# Altium PCB Copy of main - shifted.PcbDoc (part 9 of 15)
Units mil, origin at the board's own origin, x right, y up, seen from the top; angles counter-clockwise.
Board outline 8394.55 x 5164.44 mil, 7 copper layers (Top Layer 1, Layer 2, Layer 3, Unused, Layer 4_pow, Layer 5_gnd, Bottom 6+gnd), stack 46.112 mil thick; 363 components, 409 nets, 1750 pads, 991 vias.
Unrouted connection lines stored in the file: 111.
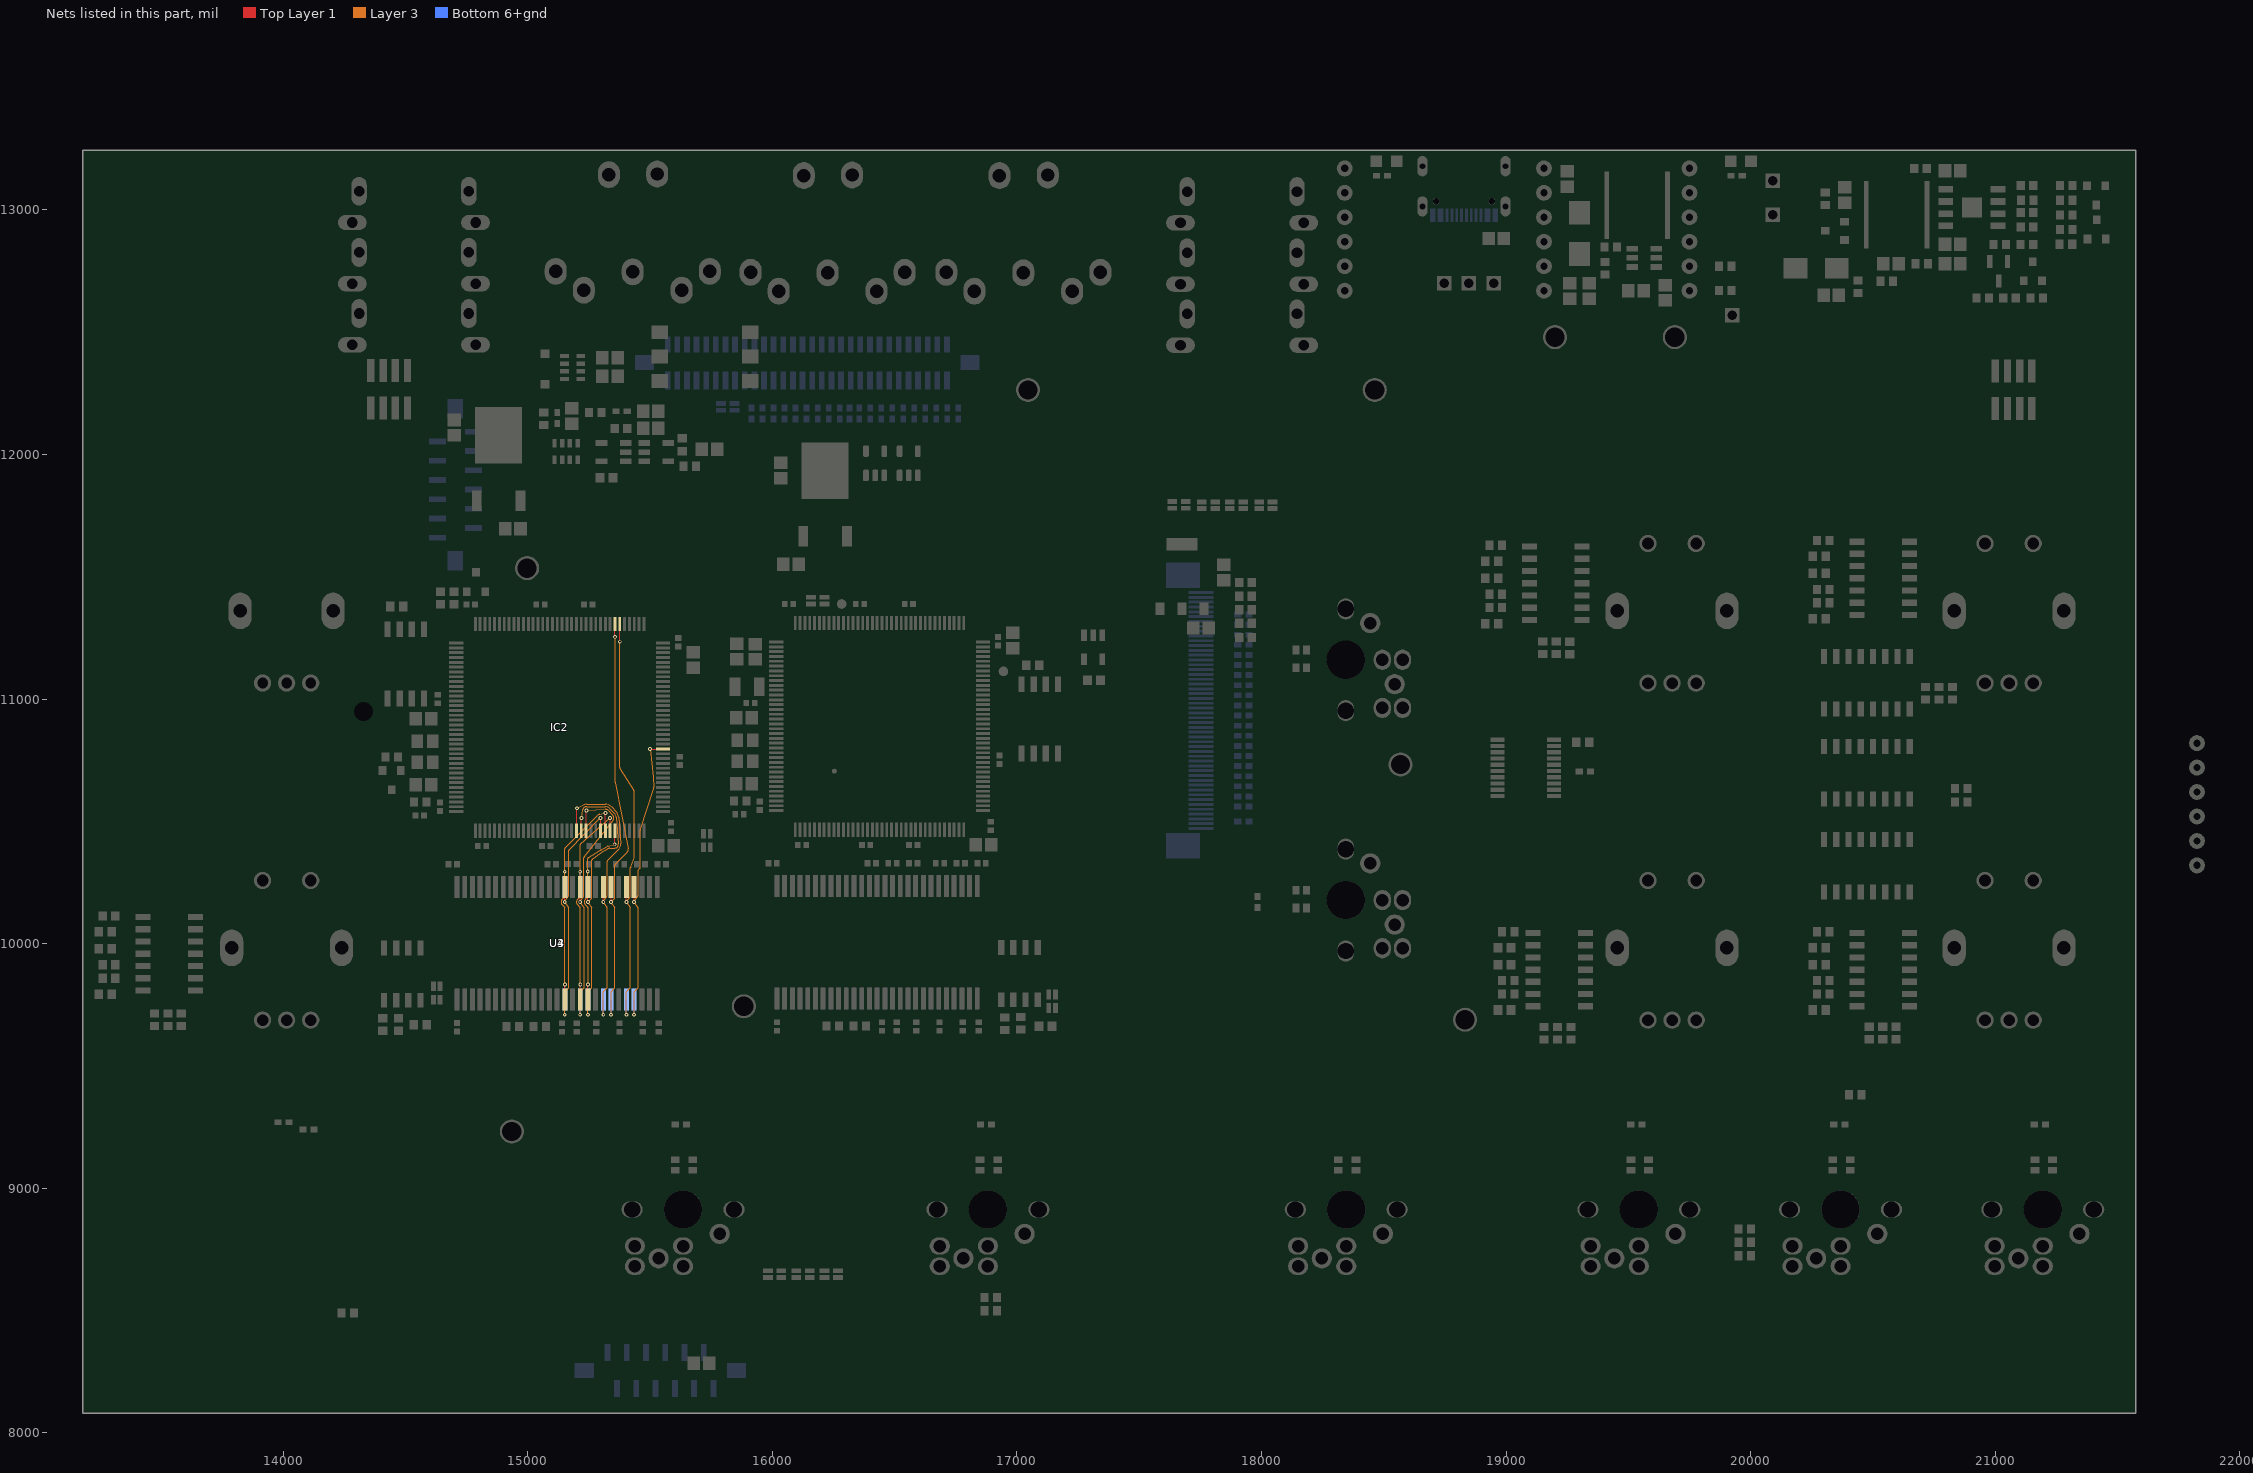
[diagram p12: the nets of this part, all layers, seen from the top]

## Via types
v1: diameter 15.75, hole 7.87, Top Layer 1 to Bottom 6+gnd, tented both sides, 923 vias
v2: diameter 27.56, hole 11.81, Top Layer 1 to Bottom 6+gnd, 45 vias
v3: diameter 23.62/23.62/23.62/23.62/23.62/23.62/23.62 (per signal layer), hole 12, Top Layer 1 to Bottom 6+gnd, tented top, 10 vias
v4: diameter 15.75, hole 7.87, Top Layer 1 to Bottom 6+gnd, 10 vias
v5: diameter 23.62/23.62/23.62/23.62/23.62/23.62/23.62 (per signal layer), hole 12, Top Layer 1 to Bottom 6+gnd, tented bottom, 3 vias

## Nets (pads, with @x,y where several pads share a name; then routed paths per layer and width w, separated by ;. In a path a pad name is that pad's centre, name@x,y a point inside that pad or via, vN(x,y) a via of type N, cw(c..) or ccw(c..) an arc to the next point about the centre after c; other vN are vias at no path point) (continued)
DD1: IC2.86 U3.4 U4.4 | length 1485.1
  Top Layer 1 w5: v1@15434.81,10170.19 U3.4@15434.81,10232.03 ; v1@15500.16,10795.89 IC2.86@15552.45,10795.89
  Layer 3 w5: v1(15434.57,9709.31) 15434.57,9803 15450.69,9819.12 15450.69,10145.78 ; v1(15434.57,10169.94) ccw(c15439.57,10169.94) 15435.62,10166.88 15449.64,10148.8 ; v1@15435.41,10172.73 ccw(c15439.57,10169.94) v1(15434.57,10169.94) ; 15450.69,10197.05 15450.69,10300.48 15458.39,10308.18 ; v1(15499.93,10795.65) 15513.42,10680.61 cw(c15498.15,10678.82) 15513.51,10679.49 15515.29,10638.84 cw(c15499.93,10638.17) 15514.56,10633.47 15460.11,10463.98 ccw(c15464.88,10462.47) 15459.88,10462.5 15459.82,10311.69 ; v1(15434.57,10169.94) cw(c15439.57,10169.94) v1@15435.41,10172.72 ; v1(15434.57,10169.94) cw(c15439.57,10169.94) v1@15435.41,10172.72 ; v1(15434.57,10169.94) cw(c15439.57,10169.94) v1@15435.41,10172.72 ; v1(15434.57,10169.94) cw(c15439.57,10169.94) v1@15435.41,10172.72 ; v1(15434.57,10169.94) cw(c15439.57,10169.94) v1@15435.41,10172.72 ; v1(15434.57,10169.94) cw(c15439.57,10169.94) v1@15435.41,10172.72 ; v1(15434.57,10169.94) cw(c15439.57,10169.94) v1@15435.41,10172.72 ; v1(15434.57,10169.94) cw(c15439.57,10169.94) v1@15435.41,10172.72 ; v1(15434.57,10169.94) cw(c15439.57,10169.94) v1@15435.41,10172.72 ; v1(15434.57,10169.94) cw(c15439.57,10169.94) v1@15435.41,10172.72 ; v1(15434.57,10169.94) cw(c15439.57,10169.94) v1@15435.41,10172.72 ; v1(15434.57,10169.94) cw(c15439.57,10169.94) v1@15435.41,10172.72 ; v1(15434.57,10169.94) cw(c15439.57,10169.94) v1@15435.41,10172.72 ; v1(15434.57,10169.94) cw(c15439.57,10169.94) v1@15435.41,10172.72 ; v1(15434.57,10169.94) cw(c15439.57,10169.94) v1@15435.41,10172.72 ; v1@15435.41,10172.72 15449.85,10194.31 ; 15449.64,10148.8 cw(c15445.69,10145.74) 15450.69,10145.83 ; 15449.64,10148.8 cw(c15445.69,10145.74) 15450.69,10145.83 ; 15449.64,10148.8 cw(c15445.69,10145.74) 15450.69,10145.83 ; 15449.64,10148.8 cw(c15445.69,10145.74) 15450.69,10145.83 ; 15449.64,10148.8 cw(c15445.69,10145.74) 15450.69,10145.83 ; 15449.64,10148.8 cw(c15445.69,10145.74) 15450.69,10145.83 ; 15449.64,10148.8 cw(c15445.69,10145.74) 15450.69,10145.83 ; 15449.64,10148.8 cw(c15445.69,10145.74) 15450.69,10145.83 ; 15449.64,10148.8 cw(c15445.69,10145.74) 15450.69,10145.83 ; 15449.64,10148.8 cw(c15445.69,10145.74) 15450.69,10145.83 ; 15449.64,10148.8 cw(c15445.69,10145.74) 15450.69,10145.83 ; 15449.64,10148.8 cw(c15445.69,10145.74) 15450.69,10145.83 ; 15449.64,10148.8 cw(c15445.69,10145.74) 15450.69,10145.83 ; 15449.64,10148.8 cw(c15445.69,10145.74) 15450.69,10145.83 ; 15449.64,10148.8 cw(c15445.69,10145.74) 15450.69,10145.83 ; 15449.64,10148.8 cw(c15445.69,10145.74) 15450.69,10145.83 ; 15449.85,10194.32 ccw(c15445.69,10197.09) 15450.69,10197 ; 15449.85,10194.32 ccw(c15445.69,10197.09) 15450.69,10197 ; 15449.85,10194.32 ccw(c15445.69,10197.09) 15450.69,10197 ; 15449.85,10194.32 ccw(c15445.69,10197.09) 15450.69,10197 ; 15449.85,10194.32 ccw(c15445.69,10197.09) 15450.69,10197 ; 15449.85,10194.32 ccw(c15445.69,10197.09) 15450.69,10197 ; 15449.85,10194.32 ccw(c15445.69,10197.09) 15450.69,10197 ; 15449.85,10194.32 ccw(c15445.69,10197.09) 15450.69,10197 ; 15449.85,10194.32 ccw(c15445.69,10197.09) 15450.69,10197 ; 15449.85,10194.32 ccw(c15445.69,10197.09) 15450.69,10197 ; 15449.85,10194.32 ccw(c15445.69,10197.09) 15450.69,10197 ; 15449.85,10194.32 ccw(c15445.69,10197.09) 15450.69,10197 ; 15449.85,10194.32 ccw(c15445.69,10197.09) 15450.69,10197 ; 15449.85,10194.32 ccw(c15445.69,10197.09) 15450.69,10197 ; 15449.85,10194.32 ccw(c15445.69,10197.09) 15450.69,10197 ; 15449.84,10194.31 ccw(c15445.69,10197.09) 15450.69,10197 ; 15458.41,10308.2 ccw(c15454.82,10311.69) 15459.82,10311.69 ; 15458.41,10308.2 ccw(c15454.82,10311.69) 15459.82,10311.69 ; 15458.41,10308.2 ccw(c15454.82,10311.69) 15459.82,10311.69 ; 15458.41,10308.2 ccw(c15454.82,10311.69) 15459.82,10311.69 ; 15458.41,10308.2 ccw(c15454.82,10311.69) 15459.82,10311.69 ; 15458.41,10308.2 ccw(c15454.82,10311.69) 15459.82,10311.69 ; 15458.41,10308.2 ccw(c15454.82,10311.69) 15459.82,10311.69 ; 15458.41,10308.2 ccw(c15454.82,10311.69) 15459.82,10311.69 ; 15458.41,10308.2 ccw(c15454.82,10311.69) 15459.82,10311.69 ; 15458.41,10308.2 ccw(c15454.82,10311.69) 15459.82,10311.69 ; 15458.41,10308.2 ccw(c15454.82,10311.69) 15459.82,10311.69 ; 15458.41,10308.2 ccw(c15454.82,10311.69) 15459.82,10311.69 ; 15458.41,10308.2 ccw(c15454.82,10311.69) 15459.82,10311.69 ; 15458.41,10308.2 ccw(c15454.82,10311.69) 15459.82,10311.69 ; 15458.41,10308.2 ccw(c15454.82,10311.69) 15459.82,10311.69 ; 15458.41,10308.2 ccw(c15454.82,10311.69) 15459.82,10311.69
  Bottom 6+gnd w5: v1@15434.81,9709.56 U4.4@15434.81,9771.4
DD2: IC2.114 U3.5 U4.5 | length 2000.5
  Top Layer 1 w5: v1@15375.91,11234.79 IC2.114@15375.91,11307.38 ; v1@15403.31,10170.19 U3.5@15403.31,10232.03
  Layer 3 w5: v1(15375.99,11234.71) 15375.99,10720.56 ccw(c15380.99,10720.56) 15376.75,10717.91 15432.87,10627.81 15432.91,10627.75 cw(c15419.85,10619.63) 15435.22,10619.63 15435.22,10354.63 ; v1(15403.07,9709.31) 15403.07,9803 15419.19,9819.12 15419.19,10145.78 ; v1(15403.07,10169.94) ccw(c15408.07,10169.94) 15404.12,10166.88 15418.14,10148.8 ; v1(15403.07,10169.94) cw(c15408.07,10169.94) 15404.16,10173.06 15418.6,10191.26 ; 15418.14,10148.8 cw(c15414.19,10145.74) 15419.19,10145.83 ; 15418.14,10148.8 cw(c15414.19,10145.74) 15419.19,10145.83 ; 15418.14,10148.8 cw(c15414.19,10145.74) 15419.19,10145.83 ; 15418.14,10148.8 cw(c15414.19,10145.74) 15419.19,10145.83 ; 15418.14,10148.8 cw(c15414.19,10145.74) 15419.19,10145.83 ; 15418.14,10148.8 cw(c15414.19,10145.74) 15419.19,10145.83 ; 15418.14,10148.8 cw(c15414.19,10145.74) 15419.19,10145.83 ; 15418.14,10148.8 cw(c15414.19,10145.74) 15419.19,10145.83 ; 15418.14,10148.8 cw(c15414.19,10145.74) 15419.19,10145.83 ; 15418.14,10148.8 cw(c15414.19,10145.74) 15419.19,10145.83 ; 15418.14,10148.8 cw(c15414.19,10145.74) 15419.19,10145.83 ; 15418.14,10148.8 cw(c15414.19,10145.74) 15419.19,10145.83 ; 15418.14,10148.8 cw(c15414.19,10145.74) 15419.19,10145.83 ; 15418.14,10148.8 cw(c15414.19,10145.74) 15419.19,10145.83 ; 15418.14,10148.8 cw(c15414.19,10145.74) 15419.19,10145.83 ; 15418.14,10148.8 cw(c15414.19,10145.74) 15419.19,10145.83 ; 15418.6,10191.26 ccw(c15414.68,10194.37) 15419.68,10194.28 ; 15418.6,10191.26 ccw(c15414.68,10194.37) 15419.68,10194.28 ; 15418.6,10191.26 ccw(c15414.68,10194.37) 15419.68,10194.28 ; 15418.6,10191.26 ccw(c15414.68,10194.37) 15419.68,10194.28 ; 15418.6,10191.26 ccw(c15414.68,10194.37) 15419.68,10194.28 ; 15418.6,10191.26 ccw(c15414.68,10194.37) 15419.68,10194.28 ; 15418.6,10191.26 ccw(c15414.68,10194.37) 15419.68,10194.28 ; 15418.6,10191.26 ccw(c15414.68,10194.37) 15419.68,10194.28 ; 15418.6,10191.26 ccw(c15414.68,10194.37) 15419.68,10194.28 ; 15418.6,10191.26 ccw(c15414.68,10194.37) 15419.68,10194.28 ; 15418.6,10191.26 ccw(c15414.68,10194.37) 15419.68,10194.28 ; 15418.6,10191.26 ccw(c15414.68,10194.37) 15419.68,10194.28 ; 15418.6,10191.26 ccw(c15414.68,10194.37) 15419.68,10194.28 ; 15418.6,10191.26 ccw(c15414.68,10194.37) 15419.68,10194.28 ; 15418.6,10191.26 ccw(c15414.68,10194.37) 15419.68,10194.28 ; 15418.6,10191.26 ccw(c15414.68,10194.37) 15419.68,10194.28 ; 15419.68,10194.32 15419.68,10309.9 cw(c15424.68,10309.91) 15420.04,10311.76 15433.41,10345.21 ; 15433.41,10345.21 ccw(c15409.85,10354.63) 15435.22,10354.63 ; 15433.41,10345.21 ccw(c15409.85,10354.63) 15435.22,10354.63 ; 15433.41,10345.21 ccw(c15409.85,10354.63) 15435.22,10354.63 ; 15433.41,10345.21 ccw(c15409.85,10354.63) 15435.22,10354.63 ; 15433.41,10345.21 ccw(c15409.85,10354.63) 15435.22,10354.63 ; 15433.41,10345.21 ccw(c15409.85,10354.63) 15435.22,10354.63 ; 15433.41,10345.21 ccw(c15409.85,10354.63) 15435.22,10354.63 ; 15433.41,10345.21 ccw(c15409.85,10354.63) 15435.22,10354.63 ; 15433.41,10345.21 ccw(c15409.85,10354.63) 15435.22,10354.63 ; 15433.41,10345.21 ccw(c15409.85,10354.63) 15435.22,10354.63 ; 15433.41,10345.21 ccw(c15409.85,10354.63) 15435.22,10354.63 ; 15433.41,10345.21 ccw(c15409.85,10354.63) 15435.22,10354.63 ; 15433.41,10345.21 ccw(c15409.85,10354.63) 15435.22,10354.63 ; 15433.41,10345.21 ccw(c15409.85,10354.63) 15435.22,10354.63 ; 15433.41,10345.21 ccw(c15409.85,10354.63) 15435.22,10354.63 ; 15433.41,10345.21 ccw(c15409.85,10354.63) 15435.22,10354.63
  Bottom 6+gnd w5: v1@15403.31,9709.56 U4.5@15403.31,9771.4
DD3: IC2.115 U3.7 U4.7 | length 1873.2
  Top Layer 1 w5: v1@15340.32,10170.19 U3.7@15340.32,10232.03 ; v1@15356.39,11254.94 IC2.115@15356.39,11307.23
  Layer 3 w5: v1(15340.08,9709.31) 15340.08,9803 15356.2,9819.12 15356.2,10145.78 ; 15355.7,10187.59 cw(c15350.7,10187.68) 15354.24,10184.15 v1(15340.08,10169.94) v1@15340.08,10167.87 ; 15355.7,10187.64 15355.7,10320.48 cw(c15360.7,10320.49) 15357.12,10323.97 15405.85,10373.89 ccw(c15394.85,10384.63) 15409.93,10387.61 15356.72,10658.97 cw(c15361.62,10659.93) 15356.62,10659.93 v1(15356.62,11254.71) ; v1@15340.08,10167.87 ccw(c15345.08,10167.88) v1@15341.32,10164.58 ; v1@15340.08,10167.87 ccw(c15345.08,10167.88) v1@15341.32,10164.58 ; v1@15340.08,10167.87 ccw(c15345.08,10167.88) v1@15341.32,10164.58 ; v1@15340.08,10167.87 ccw(c15345.08,10167.88) v1@15341.32,10164.58 ; v1@15340.08,10167.87 ccw(c15345.08,10167.88) v1@15341.32,10164.58 ; v1@15340.08,10167.87 ccw(c15345.08,10167.88) v1@15341.32,10164.58 ; v1@15340.08,10167.87 ccw(c15345.08,10167.88) v1@15341.32,10164.58 ; v1@15340.08,10167.87 ccw(c15345.08,10167.88) v1@15341.32,10164.58 ; v1@15340.08,10167.87 ccw(c15345.08,10167.88) v1@15341.32,10164.58 ; v1@15340.08,10167.87 ccw(c15345.08,10167.88) v1@15341.32,10164.58 ; v1@15340.08,10167.87 ccw(c15345.08,10167.88) v1@15341.32,10164.58 ; v1@15340.08,10167.87 ccw(c15345.08,10167.88) v1@15341.32,10164.58 ; v1@15340.08,10167.87 ccw(c15345.08,10167.88) v1@15341.32,10164.58 ; v1@15340.08,10167.87 ccw(c15345.08,10167.88) v1@15341.32,10164.58 ; v1@15340.08,10167.87 ccw(c15345.08,10167.88) v1@15341.32,10164.58 ; v1@15340.08,10167.87 ccw(c15345.08,10167.88) v1@15341.32,10164.58 ; v1@15341.32,10164.58 15354.96,10149.04 ; 15354.96,10149.04 cw(c15351.2,10145.74) 15356.2,10145.83 ; 15354.96,10149.04 cw(c15351.2,10145.74) 15356.2,10145.83 ; 15354.96,10149.04 cw(c15351.2,10145.74) 15356.2,10145.83 ; 15354.96,10149.04 cw(c15351.2,10145.74) 15356.2,10145.83 ; 15354.96,10149.04 cw(c15351.2,10145.74) 15356.2,10145.83 ; 15354.96,10149.04 cw(c15351.2,10145.74) 15356.2,10145.83 ; 15354.96,10149.04 cw(c15351.2,10145.74) 15356.2,10145.83 ; 15354.96,10149.04 cw(c15351.2,10145.74) 15356.2,10145.83 ; 15354.96,10149.04 cw(c15351.2,10145.74) 15356.2,10145.83 ; 15354.96,10149.04 cw(c15351.2,10145.74) 15356.2,10145.83 ; 15354.96,10149.04 cw(c15351.2,10145.74) 15356.2,10145.83 ; 15354.96,10149.04 cw(c15351.2,10145.74) 15356.2,10145.83 ; 15354.96,10149.04 cw(c15351.2,10145.74) 15356.2,10145.83 ; 15354.96,10149.04 cw(c15351.2,10145.74) 15356.2,10145.83 ; 15354.96,10149.04 cw(c15351.2,10145.74) 15356.2,10145.83 ; 15354.96,10149.04 cw(c15351.2,10145.74) 15356.2,10145.83
  Bottom 6+gnd w5: v1@15340.32,9709.56 U4.7@15340.32,9771.4
DD4: IC2.58 U3.8 U4.8 | length 2377.5
  Top Layer 1 w5: IC2.58@15198.91,10461.71 15199.3,10462.11 15199.3,10552.4 v1(15200.72,10553.82) ; v1@15308.83,10170.19 U3.8@15308.83,10232.03
  Layer 3 w5: v1(15200.72,10553.82) 15228.76,10567.45 ; v1(15308.58,9709.31) 15308.58,9803 15324.7,9819.12 15324.7,10145.78 ; 15324.95,10198.16 15324.95,10337.31 ; 15228.76,10567.45 cw(c15239.85,10544.63) 15239.93,10570 ; 15228.76,10567.45 cw(c15239.85,10544.63) 15239.93,10570 ; 15228.76,10567.45 cw(c15239.85,10544.63) 15239.93,10570 ; 15228.76,10567.45 cw(c15239.85,10544.63) 15239.93,10570 ; 15228.76,10567.45 cw(c15239.85,10544.63) 15239.93,10570 ; 15228.76,10567.45 cw(c15239.85,10544.63) 15239.93,10570 ; 15228.76,10567.45 cw(c15239.85,10544.63) 15239.93,10570 ; 15228.76,10567.45 cw(c15239.85,10544.63) 15239.93,10570 ; 15228.76,10567.45 cw(c15239.85,10544.63) 15239.93,10570 ; 15228.76,10567.45 cw(c15239.85,10544.63) 15239.93,10570 ; 15228.76,10567.45 cw(c15239.85,10544.63) 15239.93,10570 ; 15228.76,10567.45 cw(c15239.85,10544.63) 15239.93,10570 ; 15228.76,10567.45 cw(c15239.85,10544.63) 15239.93,10570 ; 15228.76,10567.45 cw(c15239.85,10544.63) 15239.93,10570 ; 15228.76,10567.45 cw(c15239.85,10544.63) 15239.93,10570 ; 15228.76,10567.45 cw(c15239.85,10544.63) 15239.93,10570 ; 15239.93,10570 15317.02,10569.77 ; 15317.02,10569.77 cw(c15316.94,10534.39) 15342.36,10558.99 ; 15317.02,10569.77 cw(c15316.94,10534.39) 15342.36,10558.99 ; 15317.02,10569.77 cw(c15316.94,10534.39) 15342.36,10558.99 ; 15317.02,10569.77 cw(c15316.94,10534.39) 15342.36,10558.99 ; 15317.02,10569.77 cw(c15316.94,10534.39) 15342.36,10558.99 ; 15317.02,10569.77 cw(c15316.94,10534.39) 15342.36,10558.99 ; 15317.02,10569.77 cw(c15316.94,10534.39) 15342.36,10558.99 ; 15317.02,10569.77 cw(c15316.94,10534.39) 15342.36,10558.99 ; 15317.02,10569.77 cw(c15316.94,10534.39) 15342.36,10558.99 ; 15317.02,10569.77 cw(c15316.94,10534.39) 15342.36,10558.99 ; 15317.02,10569.77 cw(c15316.94,10534.39) 15342.36,10558.99 ; 15317.02,10569.77 cw(c15316.94,10534.39) 15342.36,10558.99 ; 15317.02,10569.77 cw(c15316.94,10534.39) 15342.36,10558.99 ; 15317.02,10569.77 cw(c15316.94,10534.39) 15342.36,10558.99 ; 15317.02,10569.77 cw(c15316.94,10534.39) 15342.36,10558.99 ; 15317.02,10569.77 cw(c15316.94,10534.39) 15342.36,10558.99 ; 15323.65,10148.8 cw(c15319.7,10145.74) 15324.7,10145.83 ; 15323.65,10148.8 cw(c15319.7,10145.74) 15324.7,10145.83 ; 15323.65,10148.8 cw(c15319.7,10145.74) 15324.7,10145.83 ; 15323.65,10148.8 cw(c15319.7,10145.74) 15324.7,10145.83 ; 15323.65,10148.8 cw(c15319.7,10145.74) 15324.7,10145.83 ; 15323.65,10148.8 cw(c15319.7,10145.74) 15324.7,10145.83 ; 15323.65,10148.8 cw(c15319.7,10145.74) 15324.7,10145.83 ; 15323.65,10148.8 cw(c15319.7,10145.74) 15324.7,10145.83 ; 15323.65,10148.8 cw(c15319.7,10145.74) 15324.7,10145.83 ; 15323.65,10148.8 cw(c15319.7,10145.74) 15324.7,10145.83 ; 15323.65,10148.8 cw(c15319.7,10145.74) 15324.7,10145.83 ; 15323.65,10148.8 cw(c15319.7,10145.74) 15324.7,10145.83 ; 15323.65,10148.8 cw(c15319.7,10145.74) 15324.7,10145.83 ; 15323.65,10148.8 cw(c15319.7,10145.74) 15324.7,10145.83 ; 15323.65,10148.8 cw(c15319.7,10145.74) 15324.7,10145.83 ; 15323.65,10148.8 cw(c15319.7,10145.74) 15324.7,10145.83 ; 15323.65,10148.8 15309.64,10166.87 cw(c15313.58,10169.94) v1(15308.58,10169.94) 15308.58,10170 cw(c15313.58,10169.94) 15309.38,10172.66 15324.15,10195.49 ; 15324.15,10195.49 ccw(c15319.95,10198.21) 15324.95,10198.12 ; 15324.15,10195.49 ccw(c15319.95,10198.21) 15324.95,10198.12 ; 15324.15,10195.49 ccw(c15319.95,10198.21) 15324.95,10198.12 ; 15324.15,10195.49 ccw(c15319.95,10198.21) 15324.95,10198.12 ; 15324.15,10195.49 ccw(c15319.95,10198.21) 15324.95,10198.12 ; 15324.15,10195.49 ccw(c15319.95,10198.21) 15324.95,10198.12 ; 15324.15,10195.49 ccw(c15319.95,10198.21) 15324.95,10198.12 ; 15324.15,10195.49 ccw(c15319.95,10198.21) 15324.95,10198.12 ; 15324.15,10195.49 ccw(c15319.95,10198.21) 15324.95,10198.12 ; 15324.15,10195.49 ccw(c15319.95,10198.21) 15324.95,10198.12 ; 15324.15,10195.49 ccw(c15319.95,10198.21) 15324.95,10198.12 ; 15324.15,10195.49 ccw(c15319.95,10198.21) 15324.95,10198.12 ; 15324.15,10195.49 ccw(c15319.95,10198.21) 15324.95,10198.12 ; 15324.15,10195.49 ccw(c15319.95,10198.21) 15324.95,10198.12 ; 15324.15,10195.49 ccw(c15319.95,10198.21) 15324.95,10198.12 ; 15324.15,10195.49 ccw(c15319.95,10198.21) 15324.95,10198.12 ; 15324.95,10337.31 cw(c15329.95,10337.31) 15326.4,10340.82 ; 15324.95,10337.31 cw(c15329.95,10337.31) 15326.4,10340.82 ; 15324.95,10337.31 cw(c15329.95,10337.31) 15326.4,10340.82 ; 15324.95,10337.31 cw(c15329.95,10337.31) 15326.4,10340.82 ; 15324.95,10337.31 cw(c15329.95,10337.31) 15326.4,10340.82 ; 15324.95,10337.31 cw(c15329.95,10337.31) 15326.4,10340.82 ; 15324.95,10337.31 cw(c15329.95,10337.31) 15326.4,10340.82 ; 15324.95,10337.31 cw(c15329.95,10337.31) 15326.4,10340.82 ; 15324.95,10337.31 cw(c15329.95,10337.31) 15326.4,10340.82 ; 15324.95,10337.31 cw(c15329.95,10337.31) 15326.4,10340.82 ; 15324.95,10337.31 cw(c15329.95,10337.31) 15326.4,10340.82 ; 15324.95,10337.31 cw(c15329.95,10337.31) 15326.4,10340.82 ; 15324.95,10337.31 cw(c15329.95,10337.31) 15326.4,10340.82 ; 15324.95,10337.31 cw(c15329.95,10337.31) 15326.4,10340.82 ; 15324.95,10337.31 cw(c15329.95,10337.31) 15326.4,10340.82 ; 15324.95,10337.31 cw(c15329.95,10337.31) 15326.4,10340.82 ; 15326.4,10340.82 15327.98,10342.4 ; 15327.98,10342.4 ccw(c15310,10360.32) 15328.11,10342.53 ; 15327.98,10342.4 ccw(c15310,10360.32) 15328.11,10342.53 ; 15327.98,10342.4 ccw(c15310,10360.32) 15328.11,10342.53 ; 15327.98,10342.4 ccw(c15310,10360.32) 15328.11,10342.53 ; 15327.98,10342.4 ccw(c15310,10360.32) 15328.11,10342.53 ; 15327.98,10342.4 ccw(c15310,10360.32) 15328.11,10342.53 ; 15327.98,10342.4 ccw(c15310,10360.32) 15328.11,10342.53 ; 15327.98,10342.4 ccw(c15310,10360.32) 15328.11,10342.53 ; 15327.98,10342.4 ccw(c15310,10360.32) 15328.11,10342.53 ; 15327.98,10342.4 ccw(c15310,10360.32) 15328.11,10342.53 ; 15327.98,10342.4 ccw(c15310,10360.32) 15328.11,10342.53 ; 15327.98,10342.4 ccw(c15310,10360.32) 15328.11,10342.53 ; 15327.98,10342.4 ccw(c15310,10360.32) 15328.11,10342.53 ; 15327.98,10342.4 ccw(c15310,10360.32) 15328.11,10342.53 ; 15327.98,10342.4 ccw(c15310,10360.32) 15328.11,10342.53 ; 15327.98,10342.4 ccw(c15310,10360.32) 15328.11,10342.53 ; 15328.11,10342.53 15373.31,10388.55 ccw(c15355.21,10406.33) 15380.5,10408.4 15371.56,10517.28 ; 15342.36,10558.99 15361.68,10539.04 ; 15361.68,10539.04 cw(c15336.31,10514.39) 15371.56,10517.29 ; 15361.68,10539.04 cw(c15336.31,10514.39) 15371.56,10517.29 ; 15361.68,10539.04 cw(c15336.31,10514.39) 15371.56,10517.29 ; 15361.68,10539.04 cw(c15336.31,10514.39) 15371.56,10517.29 ; 15361.68,10539.04 cw(c15336.31,10514.39) 15371.56,10517.29 ; 15361.68,10539.04 cw(c15336.31,10514.39) 15371.56,10517.29 ; 15361.68,10539.04 cw(c15336.31,10514.39) 15371.56,10517.29 ; 15361.68,10539.04 cw(c15336.31,10514.39) 15371.56,10517.29 ; 15361.68,10539.04 cw(c15336.31,10514.39) 15371.56,10517.29 ; 15361.68,10539.04 cw(c15336.31,10514.39) 15371.56,10517.29 ; 15361.68,10539.04 cw(c15336.31,10514.39) 15371.56,10517.29 ; 15361.68,10539.04 cw(c15336.31,10514.39) 15371.56,10517.29 ; 15361.68,10539.04 cw(c15336.31,10514.39) 15371.56,10517.29 ; 15361.68,10539.04 cw(c15336.31,10514.39) 15371.56,10517.29 ; 15361.68,10539.04 cw(c15336.31,10514.39) 15371.56,10517.29 ; 15361.68,10539.04 cw(c15336.31,10514.39) 15371.56,10517.29
  Bottom 6+gnd w5: v1@15308.83,9709.56 U4.8@15308.83,9771.4
DD5: IC2.59 U3.10 U4.10 | length 2188.2
  Top Layer 1 w5: IC2.59@15218.43,10461.87 15219,10462.44 15219,10513.82 v1(15219.57,10514.39) ; v1@15245.83,10170.19 U3.10@15245.83,10232.03
  Layer 3 w5: v1(15219.57,10514.39) 15224.66,10547 cw(c15239.85,10544.63) 15239.9,10560 15317.01,10559.77 ; v1(15245.59,9709.31) 15245.59,9803 15261.71,9819.12 15261.71,10145.78 ; 15327.17,10387.95 cw(c15334.85,10374.63) 15334.15,10389.99 ; v1@15245.59,10167.87 ccw(c15250.59,10167.88) v1@15246.83,10164.58 ; v1@15245.59,10167.87 ccw(c15250.59,10167.88) v1@15246.83,10164.58 ; v1@15245.59,10167.87 ccw(c15250.59,10167.88) v1@15246.83,10164.58 ; v1@15245.59,10167.87 ccw(c15250.59,10167.88) v1@15246.83,10164.58 ; v1@15245.59,10167.87 ccw(c15250.59,10167.88) v1@15246.83,10164.58 ; v1@15245.59,10167.87 ccw(c15250.59,10167.88) v1@15246.83,10164.58 ; v1@15245.59,10167.87 ccw(c15250.59,10167.88) v1@15246.83,10164.58 ; v1@15245.59,10167.87 ccw(c15250.59,10167.88) v1@15246.83,10164.58 ; v1@15245.59,10167.87 ccw(c15250.59,10167.88) v1@15246.83,10164.58 ; v1@15245.59,10167.87 ccw(c15250.59,10167.88) v1@15246.83,10164.58 ; v1@15245.59,10167.87 ccw(c15250.59,10167.88) v1@15246.83,10164.58 ; v1@15245.59,10167.87 ccw(c15250.59,10167.88) v1@15246.83,10164.58 ; v1@15245.59,10167.87 ccw(c15250.59,10167.88) v1@15246.83,10164.58 ; v1@15245.59,10167.87 ccw(c15250.59,10167.88) v1@15246.83,10164.58 ; v1@15245.59,10167.87 ccw(c15250.59,10167.88) v1@15246.83,10164.58 ; v1@15245.59,10167.87 ccw(c15250.59,10167.88) v1@15246.83,10164.58 ; v1@15245.59,10167.87 v1(15245.59,10169.94) 15259.84,10184.24 ccw(c15256.3,10187.77) 15261.3,10187.68 15261.3,10340.53 cw(c15266.3,10340.53) 15263.3,10344.53 15300.79,10372.62 ; v1@15246.83,10164.58 15260.47,10149.04 ; 15260.47,10149.04 cw(c15256.71,10145.74) 15261.71,10145.83 ; 15260.47,10149.04 cw(c15256.71,10145.74) 15261.71,10145.83 ; 15260.47,10149.04 cw(c15256.71,10145.74) 15261.71,10145.83 ; 15260.47,10149.04 cw(c15256.71,10145.74) 15261.71,10145.83 ; 15260.47,10149.04 cw(c15256.71,10145.74) 15261.71,10145.83 ; 15260.47,10149.04 cw(c15256.71,10145.74) 15261.71,10145.83 ; 15260.47,10149.04 cw(c15256.71,10145.74) 15261.71,10145.83 ; 15260.47,10149.04 cw(c15256.71,10145.74) 15261.71,10145.83 ; 15260.47,10149.04 cw(c15256.71,10145.74) 15261.71,10145.83 ; 15260.47,10149.04 cw(c15256.71,10145.74) 15261.71,10145.83 ; 15260.47,10149.04 cw(c15256.71,10145.74) 15261.71,10145.83 ; 15260.47,10149.04 cw(c15256.71,10145.74) 15261.71,10145.83 ; 15260.47,10149.04 cw(c15256.71,10145.74) 15261.71,10145.83 ; 15260.47,10149.04 cw(c15256.71,10145.74) 15261.71,10145.83 ; 15260.47,10149.04 cw(c15256.71,10145.74) 15261.71,10145.83 ; 15260.47,10149.04 cw(c15256.71,10145.74) 15261.71,10145.83 ; 15300.79,10372.62 cw(c15310,10360.32) 15302.33,10373.64 ; 15300.79,10372.62 cw(c15310,10360.32) 15302.33,10373.64 ; 15300.79,10372.62 cw(c15310,10360.32) 15302.33,10373.64 ; 15300.79,10372.62 cw(c15310,10360.32) 15302.33,10373.64 ; 15300.79,10372.62 cw(c15310,10360.32) 15302.33,10373.64 ; 15300.79,10372.62 cw(c15310,10360.32) 15302.33,10373.64 ; 15300.79,10372.62 cw(c15310,10360.32) 15302.33,10373.64 ; 15300.79,10372.62 cw(c15310,10360.32) 15302.33,10373.64 ; 15300.79,10372.62 cw(c15310,10360.32) 15302.33,10373.64 ; 15300.79,10372.62 cw(c15310,10360.32) 15302.33,10373.64 ; 15300.79,10372.62 cw(c15310,10360.32) 15302.33,10373.64 ; 15300.79,10372.62 cw(c15310,10360.32) 15302.33,10373.64 ; 15300.79,10372.62 cw(c15310,10360.32) 15302.33,10373.64 ; 15300.79,10372.62 cw(c15310,10360.32) 15302.33,10373.64 ; 15300.79,10372.62 cw(c15310,10360.32) 15302.33,10373.64 ; 15300.79,10372.62 cw(c15310,10360.32) 15302.33,10373.64 ; 15302.33,10373.64 15327.18,10387.95 ; 15317.01,10559.77 cw(c15316.94,10534.39) 15335.17,10552.04 ; 15317.01,10559.77 cw(c15316.94,10534.39) 15335.17,10552.04 ; 15317.01,10559.77 cw(c15316.94,10534.39) 15335.17,10552.04 ; 15317.01,10559.77 cw(c15316.94,10534.39) 15335.17,10552.04 ; 15317.01,10559.77 cw(c15316.94,10534.39) 15335.17,10552.04 ; 15317.01,10559.77 cw(c15316.94,10534.39) 15335.17,10552.04 ; 15317.01,10559.77 cw(c15316.94,10534.39) 15335.17,10552.04 ; 15317.01,10559.77 cw(c15316.94,10534.39) 15335.17,10552.04 ; 15317.01,10559.77 cw(c15316.94,10534.39) 15335.17,10552.04 ; 15317.01,10559.77 cw(c15316.94,10534.39) 15335.17,10552.04 ; 15317.01,10559.77 cw(c15316.94,10534.39) 15335.17,10552.04 ; 15317.01,10559.77 cw(c15316.94,10534.39) 15335.17,10552.04 ; 15317.01,10559.77 cw(c15316.94,10534.39) 15335.17,10552.04 ; 15317.01,10559.77 cw(c15316.94,10534.39) 15335.17,10552.04 ; 15317.01,10559.77 cw(c15316.94,10534.39) 15335.17,10552.04 ; 15317.01,10559.77 cw(c15316.94,10534.39) 15335.17,10552.04 ; 15327.18,10387.95 cw(c15334.85,10374.63) 15334.15,10389.99 ; 15327.18,10387.95 cw(c15334.85,10374.63) 15334.15,10389.99 ; 15327.18,10387.95 cw(c15334.85,10374.63) 15334.15,10389.99 ; 15327.18,10387.95 cw(c15334.85,10374.63) 15334.15,10389.99 ; 15327.18,10387.95 cw(c15334.85,10374.63) 15334.15,10389.99 ; 15327.18,10387.95 cw(c15334.85,10374.63) 15334.15,10389.99 ; 15327.18,10387.95 cw(c15334.85,10374.63) 15334.15,10389.99 ; 15327.18,10387.95 cw(c15334.85,10374.63) 15334.15,10389.99 ; 15327.18,10387.95 cw(c15334.85,10374.63) 15334.15,10389.99 ; 15327.18,10387.95 cw(c15334.85,10374.63) 15334.15,10389.99 ; 15327.18,10387.95 cw(c15334.85,10374.63) 15334.15,10389.99 ; 15327.18,10387.95 cw(c15334.85,10374.63) 15334.15,10389.99 ; 15327.18,10387.95 cw(c15334.85,10374.63) 15334.15,10389.99 ; 15327.18,10387.95 cw(c15334.85,10374.63) 15334.15,10389.99 ; 15327.18,10387.95 cw(c15334.85,10374.63) 15334.15,10389.99 ; 15334.15,10389.99 15355.9,10390.97 ; 15335.17,10552.04 15354.53,10532.04 cw(c15336.31,10514.39) 15361.6,10516.47 15370.53,10407.59 ; 15355.9,10390.97 ccw(c15355.21,10406.33) 15370.53,10407.59 ; 15355.9,10390.97 ccw(c15355.21,10406.33) 15370.53,10407.59 ; 15355.9,10390.97 ccw(c15355.21,10406.33) 15370.53,10407.59 ; 15355.9,10390.97 ccw(c15355.21,10406.33) 15370.53,10407.59 ; 15355.9,10390.97 ccw(c15355.21,10406.33) 15370.53,10407.59 ; 15355.9,10390.97 ccw(c15355.21,10406.33) 15370.53,10407.59 ; 15355.9,10390.97 ccw(c15355.21,10406.33) 15370.53,10407.59 ; 15355.9,10390.97 ccw(c15355.21,10406.33) 15370.53,10407.59 ; 15355.9,10390.97 ccw(c15355.21,10406.33) 15370.53,10407.59 ; 15355.9,10390.97 ccw(c15355.21,10406.33) 15370.53,10407.59 ; 15355.9,10390.97 ccw(c15355.21,10406.33) 15370.53,10407.59 ; 15355.9,10390.97 ccw(c15355.21,10406.33) 15370.53,10407.59 ; 15355.9,10390.97 ccw(c15355.21,10406.33) 15370.53,10407.59 ; 15355.9,10390.97 ccw(c15355.21,10406.33) 15370.53,10407.59 ; 15355.9,10390.97 ccw(c15355.21,10406.33) 15370.53,10407.59 ; 15355.9,10390.97 ccw(c15355.21,10406.33) 15370.53,10407.59
  Bottom 6+gnd w5: v1@15245.83,9709.56 U4.10@15245.83,9771.4
DD6: IC2.60 U3.11 U4.11 | length 1584.3
  Top Layer 1 w5: v1@15214.34,10170.19 U3.11@15214.34,10232.03 ; IC2.60@15238.28,10461.71 15238.98,10462.42 15238.98,10543.76 v1(15239.85,10544.63)
  Layer 3 w5: v1(15214.09,9709.31) 15214.09,9803 15230.21,9819.12 15230.21,10145.78 ; v1(15214.09,10169.94) ccw(c15219.09,10169.94) 15215.14,10166.88 15229.17,10148.8 ; 15229.47,10196.3 15229.47,10352.17 ; v1(15239.85,10544.63) 15315.91,10549.73 ; v1(15214.09,10169.94) cw(c15219.09,10169.94) v1@15214.93,10172.71 ; v1(15214.09,10169.94) cw(c15219.09,10169.94) v1@15214.93,10172.71 ; v1(15214.09,10169.94) cw(c15219.09,10169.94) v1@15214.93,10172.71 ; v1(15214.09,10169.94) cw(c15219.09,10169.94) v1@15214.93,10172.71 ; v1(15214.09,10169.94) cw(c15219.09,10169.94) v1@15214.93,10172.71 ; v1(15214.09,10169.94) cw(c15219.09,10169.94) v1@15214.93,10172.71 ; v1(15214.09,10169.94) cw(c15219.09,10169.94) v1@15214.93,10172.71 ; v1(15214.09,10169.94) cw(c15219.09,10169.94) v1@15214.93,10172.71 ; v1(15214.09,10169.94) cw(c15219.09,10169.94) v1@15214.93,10172.71 ; v1(15214.09,10169.94) cw(c15219.09,10169.94) v1@15214.93,10172.71 ; v1(15214.09,10169.94) cw(c15219.09,10169.94) v1@15214.93,10172.71 ; v1(15214.09,10169.94) cw(c15219.09,10169.94) v1@15214.93,10172.71 ; v1(15214.09,10169.94) cw(c15219.09,10169.94) v1@15214.93,10172.71 ; v1(15214.09,10169.94) cw(c15219.09,10169.94) v1@15214.93,10172.71 ; v1(15214.09,10169.94) cw(c15219.09,10169.94) v1@15214.93,10172.71 ; v1(15214.09,10169.94) cw(c15219.09,10169.94) v1@15214.93,10172.71 ; v1@15214.93,10172.71 15228.65,10193.6 ; 15228.65,10193.61 ccw(c15224.47,10196.34) 15229.47,10196.25 ; 15228.65,10193.61 ccw(c15224.47,10196.34) 15229.47,10196.25 ; 15228.65,10193.61 ccw(c15224.47,10196.34) 15229.47,10196.25 ; 15228.65,10193.61 ccw(c15224.47,10196.34) 15229.47,10196.25 ; 15228.65,10193.61 ccw(c15224.47,10196.34) 15229.47,10196.25 ; 15228.65,10193.61 ccw(c15224.47,10196.34) 15229.47,10196.25 ; 15228.65,10193.61 ccw(c15224.47,10196.34) 15229.47,10196.25 ; 15228.65,10193.61 ccw(c15224.47,10196.34) 15229.47,10196.25 ; 15228.65,10193.61 ccw(c15224.47,10196.34) 15229.47,10196.25 ; 15228.65,10193.61 ccw(c15224.47,10196.34) 15229.47,10196.25 ; 15228.65,10193.61 ccw(c15224.47,10196.34) 15229.47,10196.25 ; 15228.65,10193.61 ccw(c15224.47,10196.34) 15229.47,10196.25 ; 15228.65,10193.6 ccw(c15224.47,10196.34) 15229.47,10196.25 ; 15228.65,10193.6 ccw(c15224.47,10196.34) 15229.47,10196.25 ; 15228.65,10193.6 ccw(c15224.47,10196.34) 15229.47,10196.25 ; 15228.65,10193.6 ccw(c15224.47,10196.34) 15229.47,10196.25 ; 15229.16,10148.8 cw(c15225.21,10145.74) 15230.21,10145.83 ; 15229.16,10148.8 cw(c15225.21,10145.74) 15230.21,10145.83 ; 15229.16,10148.8 cw(c15225.21,10145.74) 15230.21,10145.83 ; 15229.16,10148.8 cw(c15225.21,10145.74) 15230.21,10145.83 ; 15229.16,10148.8 cw(c15225.21,10145.74) 15230.21,10145.83 ; 15229.16,10148.8 cw(c15225.21,10145.74) 15230.21,10145.83 ; 15229.16,10148.8 cw(c15225.21,10145.74) 15230.21,10145.83 ; 15229.16,10148.8 cw(c15225.21,10145.74) 15230.21,10145.83 ; 15229.16,10148.8 cw(c15225.21,10145.74) 15230.21,10145.83 ; 15229.16,10148.8 cw(c15225.21,10145.74) 15230.21,10145.83 ; 15229.16,10148.8 cw(c15225.21,10145.74) 15230.21,10145.83 ; 15229.16,10148.8 cw(c15225.21,10145.74) 15230.21,10145.83 ; 15229.16,10148.8 cw(c15225.21,10145.74) 15230.21,10145.83 ; 15229.16,10148.8 cw(c15225.21,10145.74) 15230.21,10145.83 ; 15229.16,10148.8 cw(c15225.21,10145.74) 15230.21,10145.83 ; 15229.16,10148.8 cw(c15225.21,10145.74) 15230.21,10145.83 ; 15229.47,10352.17 cw(c15234.47,10352.17) 15230.54,10355.27 ; 15229.47,10352.17 cw(c15234.47,10352.17) 15230.54,10355.27 ; 15229.47,10352.17 cw(c15234.47,10352.17) 15230.54,10355.27 ; 15229.47,10352.17 cw(c15234.47,10352.17) 15230.54,10355.27 ; 15229.47,10352.17 cw(c15234.47,10352.17) 15230.54,10355.27 ; 15229.47,10352.17 cw(c15234.47,10352.17) 15230.54,10355.27 ; 15229.47,10352.17 cw(c15234.47,10352.17) 15230.54,10355.27 ; 15229.47,10352.17 cw(c15234.47,10352.17) 15230.54,10355.27 ; 15229.47,10352.17 cw(c15234.47,10352.17) 15230.54,10355.27 ; 15229.47,10352.17 cw(c15234.47,10352.17) 15230.54,10355.27 ; 15229.47,10352.17 cw(c15234.47,10352.17) 15230.54,10355.27 ; 15229.47,10352.17 cw(c15234.47,10352.17) 15230.54,10355.27 ; 15229.47,10352.17 cw(c15234.47,10352.17) 15230.54,10355.27 ; 15229.47,10352.17 cw(c15234.47,10352.17) 15230.54,10355.27 ; 15229.47,10352.17 cw(c15234.47,10352.17) 15230.54,10355.27 ; 15229.47,10352.17 cw(c15234.47,10352.17) 15230.54,10355.27 ; 15230.54,10355.27 15348.38,10504.88 ccw(c15336.31,10514.39) 15347.35,10525.09 15327.98,10545.09 ; 15315.91,10549.73 cw(c15316.94,10534.39) 15327.98,10545.09 ; 15315.91,10549.73 cw(c15316.94,10534.39) 15327.98,10545.09 ; 15315.91,10549.73 cw(c15316.94,10534.39) 15327.98,10545.09 ; 15315.91,10549.73 cw(c15316.94,10534.39) 15327.98,10545.09 ; 15315.91,10549.73 cw(c15316.94,10534.39) 15327.98,10545.09 ; 15315.91,10549.73 cw(c15316.94,10534.39) 15327.98,10545.09 ; 15315.91,10549.73 cw(c15316.94,10534.39) 15327.98,10545.09 ; 15315.91,10549.73 cw(c15316.94,10534.39) 15327.98,10545.09 ; 15315.91,10549.73 cw(c15316.94,10534.39) 15327.98,10545.09 ; 15315.91,10549.73 cw(c15316.94,10534.39) 15327.98,10545.09 ; 15315.91,10549.73 cw(c15316.94,10534.39) 15327.98,10545.09 ; 15315.91,10549.73 cw(c15316.94,10534.39) 15327.98,10545.09 ; 15315.91,10549.73 cw(c15316.94,10534.39) 15327.98,10545.09 ; 15315.91,10549.73 cw(c15316.94,10534.39) 15327.98,10545.09 ; 15315.91,10549.73 cw(c15316.94,10534.39) 15327.98,10545.09 ; 15315.91,10549.73 cw(c15316.94,10534.39) 15327.98,10545.09
  Bottom 6+gnd w5: v1@15214.34,9709.56 U4.11@15214.34,9771.4
DD7: IC2.63 U3.13 U4.13 | length 1246.9
  Top Layer 1 w5: v1@15151.35,10170.19 U3.13@15151.35,10232.03 ; IC2.63@15297.23,10461.87 v1@15297.17,10514.16
  Layer 3 w5: v1(15151.1,9709.31) 15151.1,9803 15166.96,9818.86 15166.96,10146.04 ; v1(15151.1,10169.94) cw(c15156.1,10169.94) 15151.92,10172.68 15165.65,10193.6 ; 15166.47,10196.3 15166.47,10379.18 ; v1(15296.94,10514.39) 15167.9,10382.68 ccw(c15171.47,10379.18) 15166.47,10379.18 ; v1(15151.1,10169.94) ccw(c15156.1,10169.94) v1@15152.14,10166.89 ; v1(15151.1,10169.94) ccw(c15156.1,10169.94) v1@15152.13,10166.9 ; v1(15151.1,10169.94) ccw(c15156.1,10169.94) v1@15152.13,10166.9 ; v1(15151.1,10169.94) ccw(c15156.1,10169.94) v1@15152.13,10166.9 ; v1(15151.1,10169.94) ccw(c15156.1,10169.94) v1@15152.13,10166.9 ; v1(15151.1,10169.94) ccw(c15156.1,10169.94) v1@15152.13,10166.9 ; v1(15151.1,10169.94) ccw(c15156.1,10169.94) v1@15152.13,10166.9 ; v1(15151.1,10169.94) ccw(c15156.1,10169.94) v1@15152.13,10166.9 ; v1(15151.1,10169.94) ccw(c15156.1,10169.94) v1@15152.13,10166.9 ; v1(15151.1,10169.94) ccw(c15156.1,10169.94) v1@15152.13,10166.9 ; v1(15151.1,10169.94) ccw(c15156.1,10169.94) v1@15152.13,10166.9 ; v1(15151.1,10169.94) ccw(c15156.1,10169.94) v1@15152.13,10166.9 ; v1(15151.1,10169.94) ccw(c15156.1,10169.94) v1@15152.13,10166.9 ; v1(15151.1,10169.94) ccw(c15156.1,10169.94) v1@15152.13,10166.9 ; v1(15151.1,10169.94) ccw(c15156.1,10169.94) v1@15152.13,10166.9 ; v1(15151.1,10169.94) ccw(c15156.1,10169.94) v1@15152.13,10166.9 ; v1@15152.14,10166.89 15165.92,10149.05 ; 15165.66,10193.6 ccw(c15161.47,10196.34) 15166.47,10196.25 ; 15165.66,10193.6 ccw(c15161.47,10196.34) 15166.47,10196.25 ; 15165.66,10193.6 ccw(c15161.47,10196.34) 15166.47,10196.25 ; 15165.66,10193.6 ccw(c15161.47,10196.34) 15166.47,10196.25 ; 15165.66,10193.6 ccw(c15161.47,10196.34) 15166.47,10196.25 ; 15165.66,10193.6 ccw(c15161.47,10196.34) 15166.47,10196.25 ; 15165.66,10193.6 ccw(c15161.47,10196.34) 15166.47,10196.25 ; 15165.66,10193.6 ccw(c15161.47,10196.34) 15166.47,10196.25 ; 15165.66,10193.6 ccw(c15161.47,10196.34) 15166.47,10196.25 ; 15165.66,10193.6 ccw(c15161.47,10196.34) 15166.47,10196.25 ; 15165.66,10193.6 ccw(c15161.47,10196.34) 15166.47,10196.25 ; 15165.66,10193.6 ccw(c15161.47,10196.34) 15166.47,10196.25 ; 15165.66,10193.6 ccw(c15161.47,10196.34) 15166.47,10196.25 ; 15165.66,10193.6 ccw(c15161.47,10196.34) 15166.47,10196.25 ; 15165.66,10193.6 ccw(c15161.47,10196.34) 15166.47,10196.25 ; 15165.65,10193.6 ccw(c15161.47,10196.34) 15166.47,10196.25 ; 15165.92,10149.05 cw(c15161.96,10146) 15166.96,10146.09 ; 15165.92,10149.05 cw(c15161.96,10146) 15166.96,10146.09 ; 15165.92,10149.05 cw(c15161.96,10146) 15166.96,10146.09 ; 15165.92,10149.05 cw(c15161.96,10146) 15166.96,10146.09 ; 15165.92,10149.05 cw(c15161.96,10146) 15166.96,10146.09 ; 15165.92,10149.05 cw(c15161.96,10146) 15166.96,10146.09 ; 15165.92,10149.05 cw(c15161.96,10146) 15166.96,10146.09 ; 15165.92,10149.05 cw(c15161.96,10146) 15166.96,10146.09 ; 15165.92,10149.05 cw(c15161.96,10146) 15166.96,10146.09 ; 15165.92,10149.05 cw(c15161.96,10146) 15166.96,10146.09 ; 15165.92,10149.05 cw(c15161.96,10146) 15166.96,10146.09 ; 15165.92,10149.05 cw(c15161.96,10146) 15166.96,10146.09 ; 15165.92,10149.05 cw(c15161.96,10146) 15166.96,10146.09 ; 15165.92,10149.05 cw(c15161.96,10146) 15166.96,10146.09 ; 15165.92,10149.05 cw(c15161.96,10146) 15166.96,10146.09 ; 15165.92,10149.05 cw(c15161.96,10146) 15166.96,10146.09 ; 15166.47,10379.18 cw(c15171.47,10379.18) 15167.89,10382.67 ; 15166.47,10379.18 cw(c15171.47,10379.18) 15167.89,10382.67 ; 15166.47,10379.18 cw(c15171.47,10379.18) 15167.89,10382.67 ; 15166.47,10379.18 cw(c15171.47,10379.18) 15167.89,10382.67 ; 15166.47,10379.18 cw(c15171.47,10379.18) 15167.89,10382.67 ; 15166.47,10379.18 cw(c15171.47,10379.18) 15167.89,10382.67 ; 15166.47,10379.18 cw(c15171.47,10379.18) 15167.89,10382.67 ; 15166.47,10379.18 cw(c15171.47,10379.18) 15167.89,10382.66 ; 15166.47,10379.18 cw(c15171.47,10379.18) 15167.89,10382.66 ; 15166.47,10379.18 cw(c15171.47,10379.18) 15167.89,10382.66 ; 15166.47,10379.18 cw(c15171.47,10379.18) 15167.89,10382.66 ; 15166.47,10379.18 cw(c15171.47,10379.18) 15167.89,10382.66 ; 15166.47,10379.18 cw(c15171.47,10379.18) 15167.89,10382.66 ; 15166.47,10379.18 cw(c15171.47,10379.18) 15167.89,10382.66 ; 15166.47,10379.18 cw(c15171.47,10379.18) 15167.89,10382.66
  Bottom 6+gnd w5: v1@15151.35,9709.56 U4.13@15151.35,9771.4
DD8: IC2.64 U3.42 U4.42 | length 1288.6
  Top Layer 1 w5: U3.42@15151.35,9771.4 v1@15151.35,9833.24 ; IC2.64@15317.02,10461.71 v1@15317.02,10534.31
  Layer 3 w5: v1(15151.59,9833.49) 15151.59,10145.64 ; 15151.59,10195.56 15151.59,10293.63 v1(15151.1,10294.12) 15151.1,10388.23 ; v1(15316.94,10534.39) 15293.72,10529.43 ; 15150.13,10149.12 cw(c15146.59,10145.59) 15151.59,10145.68 ; 15150.13,10149.12 cw(c15146.59,10145.59) 15151.59,10145.68 ; 15150.13,10149.12 cw(c15146.59,10145.59) 15151.59,10145.68 ; 15150.13,10149.12 cw(c15146.59,10145.59) 15151.59,10145.68 ; 15150.13,10149.12 cw(c15146.59,10145.59) 15151.59,10145.68 ; 15150.13,10149.12 cw(c15146.59,10145.59) 15151.59,10145.68 ; 15150.13,10149.12 cw(c15146.59,10145.59) 15151.59,10145.68 ; 15150.13,10149.12 cw(c15146.59,10145.59) 15151.59,10145.68 ; 15150.13,10149.12 cw(c15146.59,10145.59) 15151.59,10145.68 ; 15150.13,10149.12 cw(c15146.59,10145.59) 15151.59,10145.68 ; 15150.13,10149.12 cw(c15146.59,10145.59) 15151.59,10145.68 ; 15150.13,10149.12 cw(c15146.59,10145.59) 15151.59,10145.68 ; 15150.13,10149.12 cw(c15146.59,10145.59) 15151.59,10145.68 ; 15150.13,10149.12 cw(c15146.59,10145.59) 15151.59,10145.68 ; 15150.13,10149.12 cw(c15146.59,10145.59) 15151.59,10145.68 ; 15150.13,10149.12 cw(c15146.59,10145.59) 15151.59,10145.68 ; 15150.13,10149.12 15140.21,10159.1 cw(c15151.1,10169.94) 15139.58,10180.12 15150.34,10192.29 ; 15150.34,10192.29 ccw(c15146.59,10195.6) 15151.59,10195.51 ; 15150.34,10192.29 ccw(c15146.59,10195.6) 15151.59,10195.51 ; 15150.34,10192.29 ccw(c15146.59,10195.6) 15151.59,10195.51 ; 15150.34,10192.29 ccw(c15146.59,10195.6) 15151.59,10195.51 ; 15150.34,10192.29 ccw(c15146.59,10195.6) 15151.59,10195.51 ; 15150.34,10192.29 ccw(c15146.59,10195.6) 15151.59,10195.51 ; 15150.34,10192.29 ccw(c15146.59,10195.6) 15151.59,10195.51 ; 15150.34,10192.29 ccw(c15146.59,10195.6) 15151.59,10195.51 ; 15150.34,10192.29 ccw(c15146.59,10195.6) 15151.59,10195.51 ; 15150.34,10192.29 ccw(c15146.59,10195.6) 15151.59,10195.51 ; 15150.34,10192.29 ccw(c15146.59,10195.6) 15151.59,10195.51 ; 15150.34,10192.29 ccw(c15146.59,10195.6) 15151.59,10195.51 ; 15150.34,10192.29 ccw(c15146.59,10195.6) 15151.59,10195.51 ; 15150.34,10192.29 ccw(c15146.59,10195.6) 15151.59,10195.51 ; 15150.34,10192.29 ccw(c15146.59,10195.6) 15151.59,10195.51 ; 15150.34,10192.29 ccw(c15146.59,10195.6) 15151.59,10195.51 ; 15151.1,10388.23 cw(c15156.1,10388.23) 15152.55,10391.74 ; 15151.1,10388.23 cw(c15156.1,10388.23) 15152.55,10391.74 ; 15151.1,10388.23 cw(c15156.1,10388.23) 15152.55,10391.74 ; 15151.1,10388.23 cw(c15156.1,10388.23) 15152.55,10391.74 ; 15151.1,10388.23 cw(c15156.1,10388.23) 15152.55,10391.74 ; 15151.1,10388.23 cw(c15156.1,10388.23) 15152.55,10391.74 ; 15151.1,10388.23 cw(c15156.1,10388.23) 15152.55,10391.74 ; 15151.1,10388.23 cw(c15156.1,10388.23) 15152.55,10391.74 ; 15151.1,10388.23 cw(c15156.1,10388.23) 15152.55,10391.74 ; 15151.1,10388.23 cw(c15156.1,10388.23) 15152.55,10391.74 ; 15151.1,10388.23 cw(c15156.1,10388.23) 15152.55,10391.74 ; 15151.1,10388.23 cw(c15156.1,10388.23) 15152.55,10391.74 ; 15151.1,10388.23 cw(c15156.1,10388.23) 15152.55,10391.74 ; 15151.1,10388.23 cw(c15156.1,10388.23) 15152.55,10391.74 ; 15151.1,10388.23 cw(c15156.1,10388.23) 15152.55,10391.74 ; 15151.1,10388.23 cw(c15156.1,10388.23) 15152.55,10391.74 ; 15152.55,10391.74 15286.08,10525.28 ; 15286.08,10525.28 cw(c15296.94,10514.39) 15293.72,10529.43 ; 15286.08,10525.28 cw(c15296.94,10514.39) 15293.72,10529.43 ; 15286.08,10525.28 cw(c15296.94,10514.39) 15293.72,10529.43 ; 15286.08,10525.28 cw(c15296.94,10514.39) 15293.72,10529.43 ; 15286.08,10525.28 cw(c15296.94,10514.39) 15293.72,10529.43 ; 15286.08,10525.28 cw(c15296.94,10514.39) 15293.72,10529.43 ; 15286.08,10525.28 cw(c15296.94,10514.39) 15293.72,10529.43 ; 15286.08,10525.28 cw(c15296.94,10514.39) 15293.72,10529.43 ; 15286.08,10525.28 cw(c15296.94,10514.39) 15293.72,10529.43 ; 15286.08,10525.28 cw(c15296.94,10514.39) 15293.72,10529.43 ; 15286.08,10525.28 cw(c15296.94,10514.39) 15293.72,10529.43 ; 15286.08,10525.28 cw(c15296.94,10514.39) 15293.72,10529.43 ; 15286.08,10525.28 cw(c15296.94,10514.39) 15293.72,10529.43 ; 15286.08,10525.28 cw(c15296.94,10514.39) 15293.72,10529.43 ; 15286.08,10525.28 cw(c15296.94,10514.39) 15293.72,10529.43 ; 15286.08,10525.28 cw(c15296.94,10514.39) 15293.72,10529.43
  Bottom 6+gnd w5: U4.42@15151.35,10232.03 v1@15151.35,10293.87
DD9: IC2.65 U3.44 U4.44 | length 1096.9
  Top Layer 1 w5: U3.44@15214.34,9771.4 v1@15214.34,9833.24 ; IC2.65@15336.54,10461.87 v1@15336.54,10514.16
  Layer 3 w5: v1(15214.58,9833.49) 15214.58,10145.64 ; 15214.58,10195.56 15214.58,10293.63 v1(15214.09,10294.12) 15214.09,10404.3 ; v1(15336.31,10514.39) 15215.78,10408.04 ; 15213.13,10149.12 cw(c15209.58,10145.59) 15214.58,10145.68 ; 15213.13,10149.12 cw(c15209.58,10145.59) 15214.58,10145.68 ; 15213.13,10149.12 cw(c15209.58,10145.59) 15214.58,10145.68 ; 15213.13,10149.12 cw(c15209.58,10145.59) 15214.58,10145.68 ; 15213.13,10149.12 cw(c15209.58,10145.59) 15214.58,10145.68 ; 15213.13,10149.12 cw(c15209.58,10145.59) 15214.58,10145.68 ; 15213.13,10149.12 cw(c15209.58,10145.59) 15214.58,10145.68 ; 15213.13,10149.12 cw(c15209.58,10145.59) 15214.58,10145.68 ; 15213.13,10149.12 cw(c15209.58,10145.59) 15214.58,10145.68 ; 15213.13,10149.12 cw(c15209.58,10145.59) 15214.58,10145.68 ; 15213.13,10149.12 cw(c15209.58,10145.59) 15214.58,10145.68 ; 15213.13,10149.12 cw(c15209.58,10145.59) 15214.58,10145.68 ; 15213.13,10149.12 cw(c15209.58,10145.59) 15214.58,10145.68 ; 15213.13,10149.12 cw(c15209.58,10145.59) 15214.58,10145.68 ; 15213.13,10149.12 cw(c15209.58,10145.59) 15214.58,10145.68 ; 15213.13,10149.12 cw(c15209.58,10145.59) 15214.58,10145.68 ; 15213.13,10149.12 15203.2,10159.1 cw(c15214.09,10169.94) 15202.57,10180.12 15213.33,10192.29 ; 15213.33,10192.29 ccw(c15209.58,10195.6) 15214.58,10195.51 ; 15213.33,10192.29 ccw(c15209.58,10195.6) 15214.58,10195.51 ; 15213.33,10192.29 ccw(c15209.58,10195.6) 15214.58,10195.51 ; 15213.33,10192.29 ccw(c15209.58,10195.6) 15214.58,10195.51 ; 15213.33,10192.29 ccw(c15209.58,10195.6) 15214.58,10195.51 ; 15213.33,10192.29 ccw(c15209.58,10195.6) 15214.58,10195.51 ; 15213.33,10192.29 ccw(c15209.58,10195.6) 15214.58,10195.51 ; 15213.33,10192.29 ccw(c15209.58,10195.6) 15214.58,10195.51 ; 15213.33,10192.29 ccw(c15209.58,10195.6) 15214.58,10195.51 ; 15213.33,10192.29 ccw(c15209.58,10195.6) 15214.58,10195.51 ; 15213.33,10192.29 ccw(c15209.58,10195.6) 15214.58,10195.51 ; 15213.33,10192.29 ccw(c15209.58,10195.6) 15214.58,10195.51 ; 15213.33,10192.29 ccw(c15209.58,10195.6) 15214.58,10195.51 ; 15213.33,10192.29 ccw(c15209.58,10195.6) 15214.58,10195.51 ; 15213.33,10192.29 ccw(c15209.58,10195.6) 15214.58,10195.51 ; 15213.33,10192.29 ccw(c15209.58,10195.6) 15214.58,10195.51 ; 15214.09,10404.3 cw(c15219.09,10404.3) 15215.78,10408.05 ; 15214.09,10404.3 cw(c15219.09,10404.3) 15215.78,10408.05 ; 15214.09,10404.3 cw(c15219.09,10404.3) 15215.78,10408.05 ; 15214.09,10404.3 cw(c15219.09,10404.3) 15215.78,10408.05 ; 15214.09,10404.3 cw(c15219.09,10404.3) 15215.78,10408.05 ; 15214.09,10404.3 cw(c15219.09,10404.3) 15215.78,10408.05 ; 15214.09,10404.3 cw(c15219.09,10404.3) 15215.78,10408.05 ; 15214.09,10404.3 cw(c15219.09,10404.3) 15215.78,10408.05 ; 15214.09,10404.3 cw(c15219.09,10404.3) 15215.78,10408.05 ; 15214.09,10404.3 cw(c15219.09,10404.3) 15215.78,10408.05 ; 15214.09,10404.3 cw(c15219.09,10404.3) 15215.78,10408.05 ; 15214.09,10404.3 cw(c15219.09,10404.3) 15215.78,10408.05 ; 15214.09,10404.3 cw(c15219.09,10404.3) 15215.78,10408.05 ; 15214.09,10404.3 cw(c15219.09,10404.3) 15215.78,10408.05 ; 15214.09,10404.3 cw(c15219.09,10404.3) 15215.78,10408.05 ; 15214.09,10404.3 cw(c15219.09,10404.3) 15215.78,10408.05
  Bottom 6+gnd w5: U4.44@15214.34,10232.03 v1@15214.34,10293.87
DD10: IC2.66 U3.45 U4.45 | length 910.2
  Top Layer 1 w5: U3.45@15245.83,9771.4 v1@15245.83,9833.24 ; v1(15355.21,10406.33) 15356.12,10407.25 IC2.66@15356.12,10461.96
  Layer 3 w5: 15233.98,10180.02 ccw(c15245.59,10169.94) 15234.69,10159.1 15244.62,10149.12 ; 15233.99,10180.03 15243.62,10191.09 ccw(c15239.85,10194.37) 15244.85,10194.28 ; 15244.85,10194.33 v1(15244.85,10294.63) 15244.85,10347.56 ; v1(15246.08,9833.49) 15246.08,10145.64 ; v1(15355.21,10406.33) 15328.3,10399.14 ccw(c15334.85,10374.63) 15322.18,10396.62 15297.34,10382.3 ccw(c15310,10360.32) 15296.81,10381.99 15247.25,10351.83 ; 15244.62,10149.12 cw(c15241.08,10145.59) 15246.08,10145.68 ; 15244.62,10149.12 cw(c15241.08,10145.59) 15246.08,10145.68 ; 15244.62,10149.12 cw(c15241.08,10145.59) 15246.08,10145.68 ; 15244.62,10149.12 cw(c15241.08,10145.59) 15246.08,10145.68 ; 15244.62,10149.12 cw(c15241.08,10145.59) 15246.08,10145.68 ; 15244.62,10149.12 cw(c15241.08,10145.59) 15246.08,10145.68 ; 15244.62,10149.12 cw(c15241.08,10145.59) 15246.08,10145.68 ; 15244.62,10149.12 cw(c15241.08,10145.59) 15246.08,10145.68 ; 15244.62,10149.12 cw(c15241.08,10145.59) 15246.08,10145.68 ; 15244.62,10149.12 cw(c15241.08,10145.59) 15246.08,10145.68 ; 15244.62,10149.12 cw(c15241.08,10145.59) 15246.08,10145.68 ; 15244.62,10149.12 cw(c15241.08,10145.59) 15246.08,10145.68 ; 15244.62,10149.12 cw(c15241.08,10145.59) 15246.08,10145.68 ; 15244.62,10149.12 cw(c15241.08,10145.59) 15246.08,10145.68 ; 15244.62,10149.12 cw(c15241.08,10145.59) 15246.08,10145.68 ; 15244.62,10149.12 cw(c15241.08,10145.59) 15246.08,10145.68 ; 15244.85,10347.56 cw(c15249.85,10347.56) 15247.25,10351.83 ; 15244.85,10347.56 cw(c15249.85,10347.56) 15247.25,10351.83 ; 15244.85,10347.56 cw(c15249.85,10347.56) 15247.25,10351.83 ; 15244.85,10347.56 cw(c15249.85,10347.56) 15247.25,10351.83 ; 15244.85,10347.56 cw(c15249.85,10347.56) 15247.25,10351.83
  Bottom 6+gnd w5: v1(15244.85,10294.63) 15244.85,10233.01 U4.45@15245.83,10232.03